# EAGLE board chart (EAGLE 7.6.0)
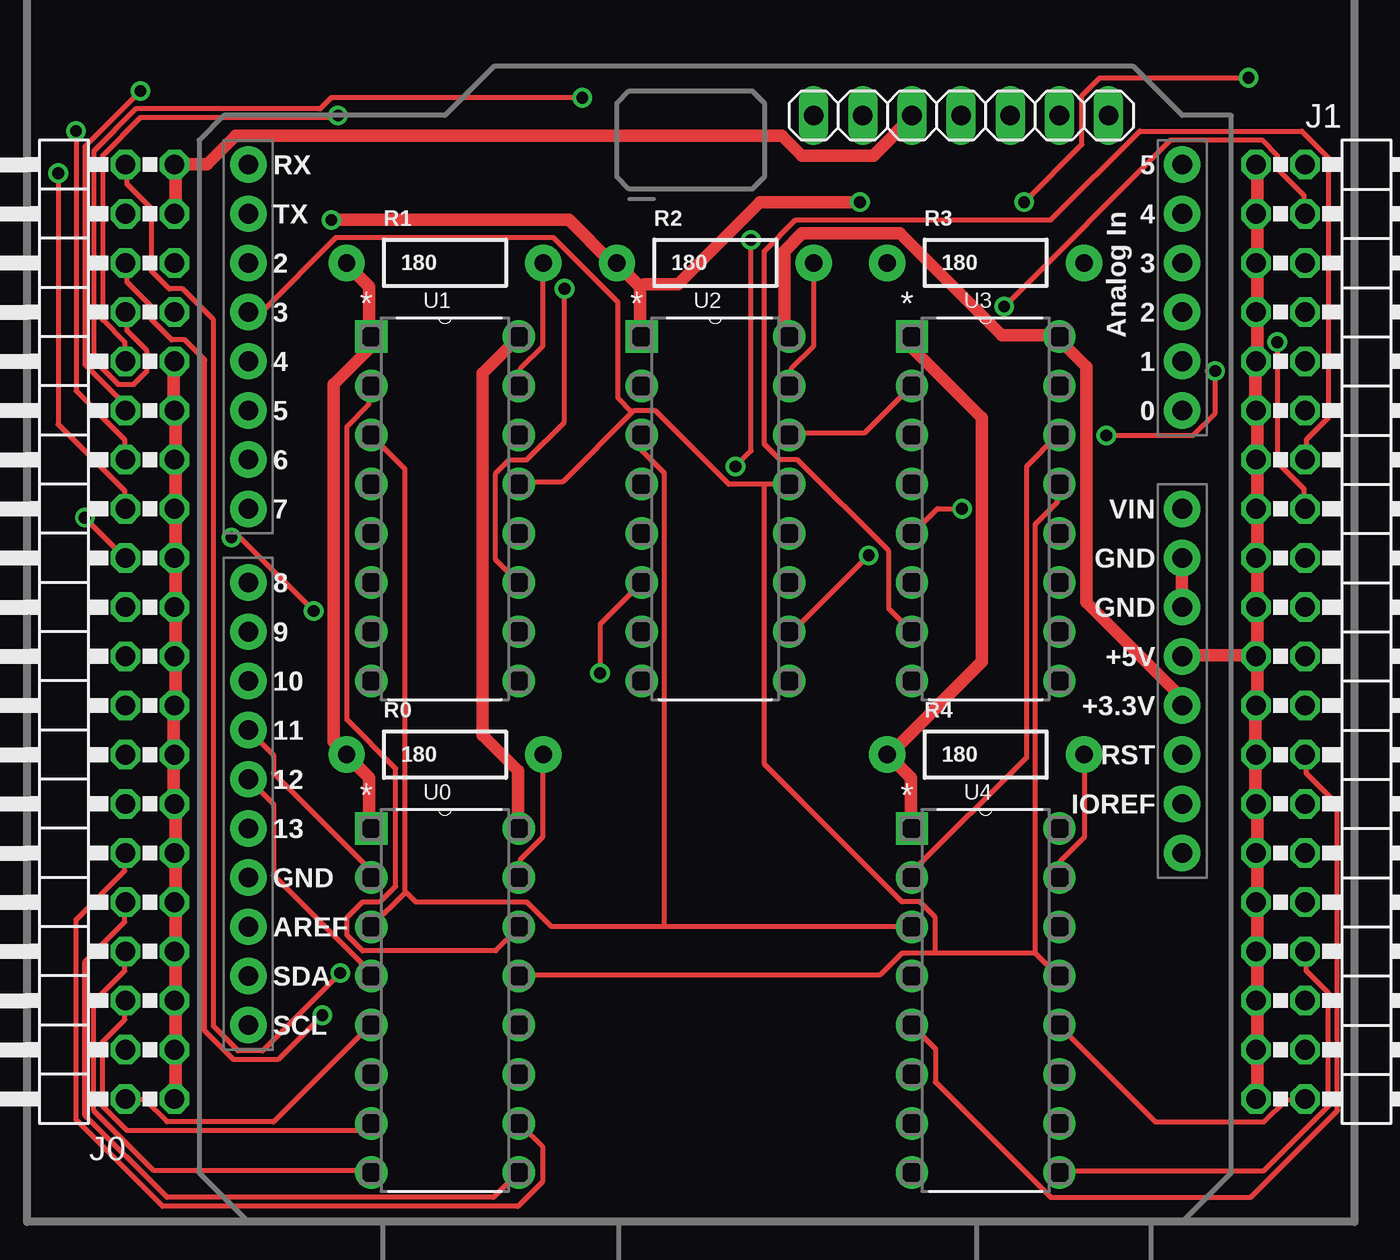
[diagram p0: board, top side]
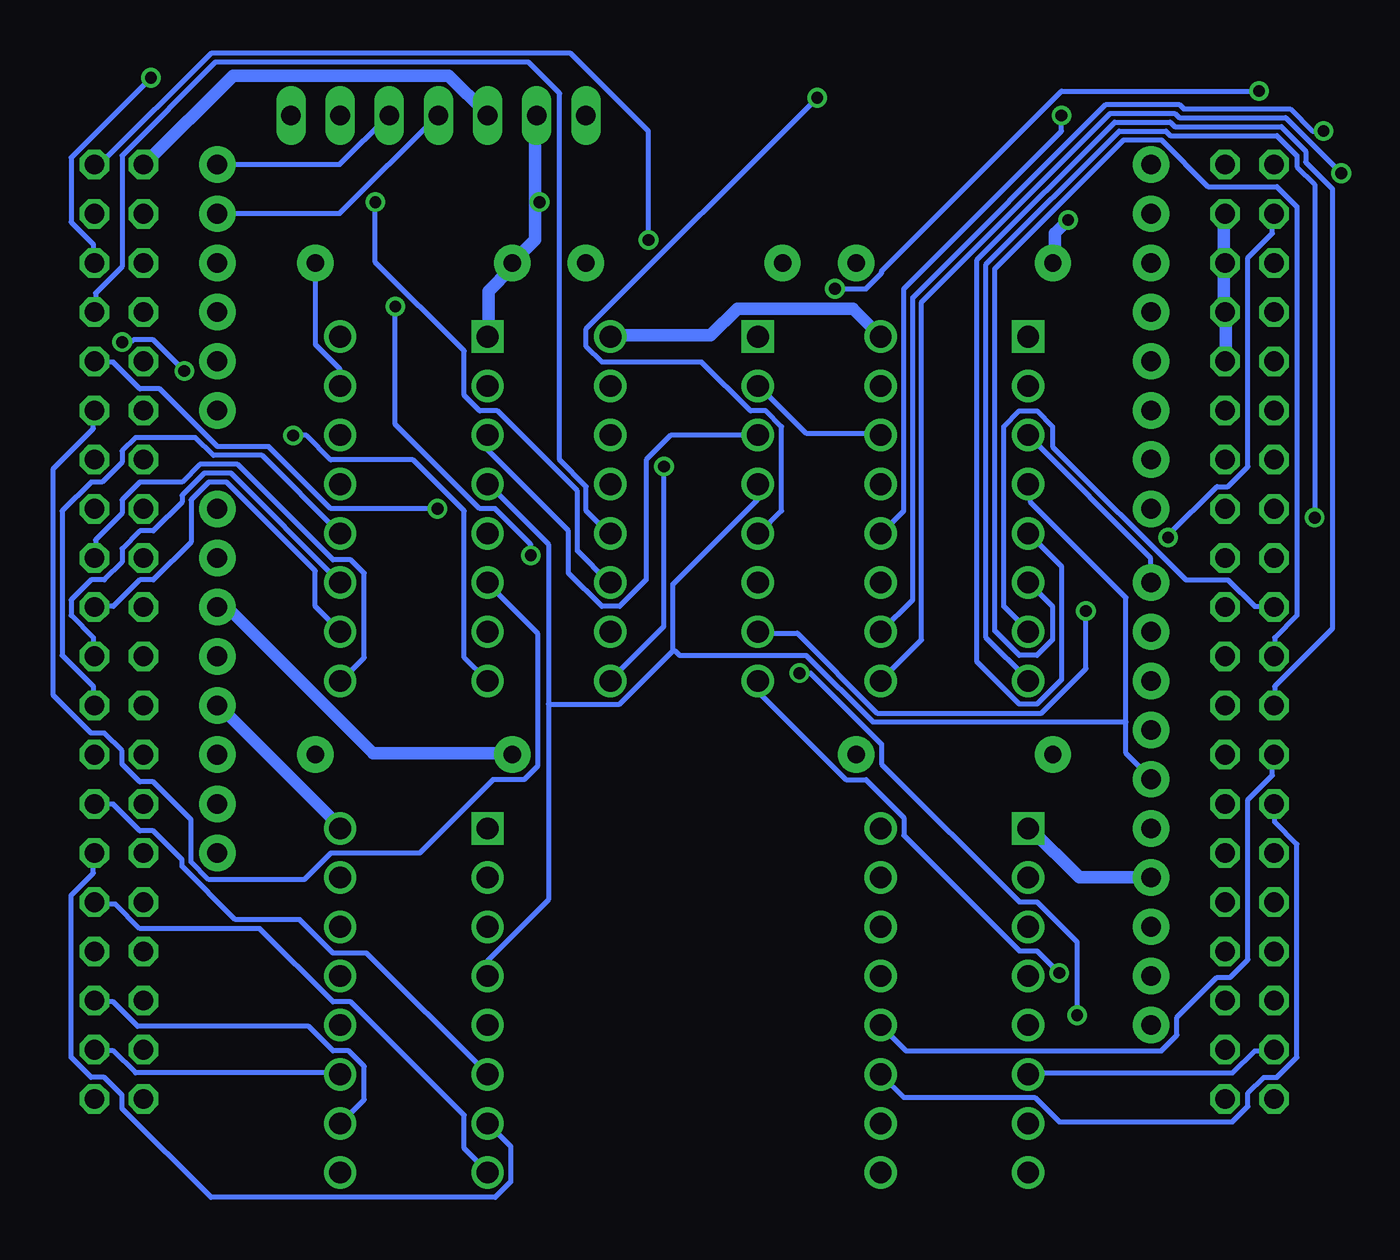
[diagram p1: board, bottom side, seen from below]

No outline drawn. Coordinates in mm, seen from the top.
Copper layers (1*16): Top 0.035mm / dielectric 1.5mm / Bottom 0.035mm
Design rules "chart": minimum track width 10mil, minimum drill 24mil, track to track 0.205mm, track to pad 0.205mm, pad to pad 0.205mm, via to via 0.205mm, smd to smd 8mil, copper to edge 40mil, drill to drill 8mil, minimum pad ring 10mil, minimum via ring 8mil, stop-mask expansion 4mil, vias tented up to drill 0mil, thermal gap 10mil
Net classes: 0 default: width 0.254 mm, clearance 0.205 mm; 1 ground: width 0.635 mm, clearance 0.205 mm to class 0, clearance 0.254 mm; 2 VCC: width 0.635 mm, clearance 0.205 mm to class 0, clearance 0.205 mm to class 1, clearance 0.254 mm

## Footprints (pad centres in the part's own frame; a part is rotated, then mirrored left to right if it is on the bottom)
UNO_R3_SHIELD = drill 1.016 pad 1.88: 3.3V 50.8,26.67; 5V 50.8,29.21; A0 50.8,41.91; A1 50.8,44.45; A2 50.8,46.99; A3 50.8,49.53; A4 50.8,52.07; A5 50.8,54.61; AREF 2.54,15.24; D2 2.54,49.53; D3 2.54,46.99; D4 2.54,44.45; D5 2.54,41.91; D6 2.54,39.37; D7 2.54,36.83; D8 2.54,33.02; D9 2.54,30.48; D10 2.54,27.94; D11 2.54,25.4; D12 2.54,22.86; D13 2.54,20.32; GND@0 50.8,31.75; GND@1 50.8,34.29; GND@2 2.54,17.78; IOREF 50.8,21.59; NC 50.8,19.05; RES 50.8,24.13; RX 2.54,54.61; SCL 2.54,10.16; SDA 2.54,12.7; TX 2.54,52.07; VIN 50.8,36.83
2X20/90 = drill 1.016 octagon: 1 -24.13,-6.35; 2 -24.13,-3.81; 3 -21.59,-6.35; 4 -21.59,-3.81; 5 -19.05,-6.35; 6 -19.05,-3.81; 7 -16.51,-6.35; 8 -16.51,-3.81; 9 -13.97,-6.35; 10 -13.97,-3.81; 11 -11.43,-6.35; 12 -11.43,-3.81; 13 -8.89,-6.35; 14 -8.89,-3.81; 15 -6.35,-6.35; 16 -6.35,-3.81; 17 -3.81,-6.35; 18 -3.81,-3.81; 19 -1.27,-6.35; 20 -1.27,-3.81; 21 1.27,-6.35; 22 1.27,-3.81; 23 3.81,-6.35; 24 3.81,-3.81; 25 6.35,-6.35; 26 6.35,-3.81; 27 8.89,-6.35; 28 8.89,-3.81; 29 11.43,-6.35; 30 11.43,-3.81; 31 13.97,-6.35; 32 13.97,-3.81; 33 16.51,-6.35; 34 16.51,-3.81; 35 19.05,-6.35; 36 19.05,-3.81; 37 21.59,-6.35; 38 21.59,-3.81; 39 24.13,-6.35; 40 24.13,-3.81
1X07 = drill 1.016 long: 1 -7.62,0; 2 -5.08,0; 3 -2.54,0; 4 0,0; 5 2.54,0; 6 5.08,0; 7 7.62,0
AXIAL-0.4 = drill 0.9 pad 1.88: P$1 -5.08,0; P$2 5.08,0
DIP254P762X508-16 = drill 1.118 square: 1 -7.62,17.78 | drill 1.118: 2 -7.62,15.24; 3 -7.62,12.7; 4 -7.62,10.16; 5 -7.62,7.62; 6 -7.62,5.08; 7 -7.62,2.54; 8 -7.62,0; 9 0,0; 10 0,2.54; 11 0,5.08; 12 0,7.62; 13 0,10.16; 14 0,12.7; 15 0,15.24; 16 0,17.78

## Placement (x,y rotation side)
B0  ARDUINO_R3_SHIELD  [UNO_R3_SHIELD]  8.89,0 0 top
J0  2x20  [2X20/90]  1.27,30.48 90 top
J1  2x20  [2X20/90]  69.85,30.48 270 top
JPRTC0  Tiny RTC  [1X07]  48.26,57.15 0 top
R0  180  [AXIAL-0.4]  21.59,24.13 0 top
R1  180  [AXIAL-0.4]  21.59,49.53 0 top
R2  180  [AXIAL-0.4]  35.56,49.53 0 top
R3  180  [AXIAL-0.4]  49.53,49.53 0 top
R4  180  [AXIAL-0.4]  49.53,24.13 0 top
U0  TLC5916IN  [DIP254P762X508-16]  25.4,2.54 0 top
U1  TLC5916IN  [DIP254P762X508-16]  25.4,27.94 0 top
U2  TLC5916IN  [DIP254P762X508-16]  39.37,27.94 0 top
U3  TLC5916IN  [DIP254P762X508-16]  53.34,27.94 0 top
U4  TLC5916IN  [DIP254P762X508-16]  53.34,2.54 0 top

## Library data of the parts
B0 = SparkFun-Boards
J0 J1 JPRTC0 = pinhead
R0 R1-R4 = SparkFun-Resistors
U0 U1-U4 = Texas Instruments_By_element14_Batch_1; MPN: TLC5916IN; OC_FARNELL: 1647814; OC_NEWARK: 60M1749; PACKAGE: PDIP-16; SUPPLIER: Texas Instruments

## Nets
BAT: JPRTC0.1
DATA0: B0.D11 U0.2
DATA1: U0.14 U1.2
DATA2: U1.14 U2.2
DATA3: U2.14 U3.2
DATA4: U3.14 U4.2
DATA5: U4.14
DS-NC: JPRTC0.6
GND [ground]: B0.GND@0 B0.GND@1 B0.GND@2 JPRTC0.2 R0.P$1 R1.P$1 R2.P$1 R3.P$1 R4.P$1 U0.1 U1.1 U2.1 U3.1 U4.1
L0-0: J0.2 U0.5
L0-1: J0.4 U0.6
L0-2: J0.6 U0.7
L0-3: J0.8 U0.8
L0-4: J0.10 U0.9
L0-5: J0.12 U0.10
L0-6: J0.14 U0.11
L0-7: J0.16 U0.12
L1-0: J0.18 U1.5
L1-1: J0.20 U1.6
L1-2: J0.22 U1.7
L1-3: J0.24 U1.8
L1-4: J0.26 U1.9
L1-5: J0.28 U1.10
L1-6: J0.30 U1.11
L1-7: J0.32 U1.12
L2-0: J0.34 U2.5
L2-1: J0.36 U2.6
L2-2: J0.38 U2.7
L2-3: J0.40 U2.8
L2-4: J1.2 U2.9
L2-5: J1.4 U2.10
L2-6: J1.6 U2.11
L2-7: J1.8 U2.12
L3-0: J1.10 U3.5
L3-1: J1.12 U3.6
L3-2: J1.14 U3.7
L3-3: J1.16 U3.8
L3-4: J1.18 U3.9
L3-5: J1.20 U3.10
L3-6: J1.22 U3.11
L3-7: J1.24 U3.12
L4-0: J1.26 U4.5
L4-1: J1.28 U4.6
L4-2: J1.30 U4.7
L4-3: J1.32 U4.8
L4-4: J1.34 U4.9
L4-5: J1.36 U4.10
L4-6: J1.38 U4.11
L4-7: J1.40 U4.12
LATCH: B0.D12 U0.4 U1.4 U2.4 U3.4 U4.4
N$1: R1.P$2 U1.15
N$2: R2.P$2 U2.15
N$3: R3.P$2 U3.15
N$4: R4.P$2 U4.15
N$6: R0.P$2 U0.15
PWM: B0.D3 U0.13 U1.13 U2.13 U3.13 U4.13
SCA: B0.A4 JPRTC0.4
SCK: B0.D8 U0.3 U1.3 U2.3 U3.3 U4.3
SCL: B0.A5 JPRTC0.5
SQ-NC: JPRTC0.7
VCC [VCC]: B0.5V J0.1 J0.3 J0.5 J0.7 J0.9 J0.11 J0.13 J0.15 J0.17 J0.19 J0.21 J0.23 J0.25 J0.27 J0.29 J0.31 J0.33 J0.35 J0.37 J0.39 J1.1 J1.3 J1.5 J1.7 J1.9 J1.11 J1.13 J1.15 J1.17 J1.19 J1.21 J1.23 J1.25 J1.27 J1.29 J1.31 J1.33 J1.35 J1.37 J1.39 JPRTC0.3
VDD [VCC]: B0.3.3V U0.16 U1.16 U2.16 U3.16 U4.16

## Tracks (layer width: path | path; a pad name or v marks a point on that pad's centre or on a via)
DATA0
  Top 0.254: U0.2 17.67,17.79 17.67,18.25 12.74,23.18 12.74,24.1 11.47,25.36 B0.D11
DATA1
  Top 0.254: U1.2 17.67,43.15 17.67,42.23 16.52,41.08 16.52,25.93 19.05,23.41 19.05,17.33 18.25,16.52 17.33,16.52 16.52,15.72 16.52,14.8 17.33,14 24.21,14 25.36,15.15 U0.14
DATA2
  Bottom 0.254: U1.14 25.47,40.74 29.26,40.74 31.67,43.15 U2.2
DATA3
  Top 0.254: U2.14 39.47,40.74 43.26,40.74 45.67,43.15 U3.2
DATA4
  Top 0.254: U4.2 45.78,17.79 45.78,18.13 51.64,23.98 51.64,39.02 53.24,40.62 U3.14
GND  (via drill 0.61)
  Top 0.635: R1.P$1 16.52,49.46 17.67,48.31 17.67,45.78 U1.1 17.67,45.44 17.67,45.1 15.84,43.26 15.84,24.79 16.29,24.33 R0.P$1 16.52,24.1 17.67,22.95 17.67,20.43 U0.1 | 31.67,48.31 31.67,45.78 U2.1 | 31.67,48.31 30.52,49.46 R2.P$1 30.18,49.57 28,51.75 v15.72,51.75 | v43.03,52.67 37.87,52.67 33.62,48.42 31.9,48.42 31.67,48.31 | B0.GND@0 59.67,31.79 59.67,34.2 B0.GND@1 | U4.1 45.67,20.43 45.67,22.95 44.52,24.1 R4.P$1 44.75,24.33 49.34,28.92 49.34,41.54 45.78,45.1 45.78,45.67 U3.1
  Bottom 0.635: B0.GND@2 11.47,17.79 15.15,17.79 17.67,20.31 U0.1 | 43.26,52.67 43.26,50.72 44.41,49.57 R3.P$1 44.52,49.23 45.67,48.08 45.67,45.78 U3.1 | 43.26,52.67 43.26,57.15 JPRTC0.2 | v43.03,52.67 43.26,52.67 | B0.GND@0 59.67,31.67 59.1,31.67 51.64,24.21 44.52,24.21 R4.P$1 | v15.72,51.75 16.41,51.06 16.41,49.57 R1.P$1
L0-0
  Top 0.254: J0.2 5.16,6.31 6.08,6.31 7.23,5.16 12.74,5.16 17.67,10.1 U0.5
L0-1
  Bottom 0.254: J0.4 5.16,8.84 6.08,8.84 7.23,7.69 17.67,7.69 U0.6
L0-2
  Top 0.254: J0.6 5.05,11.36 5.05,10.44 3.9,9.29 3.9,5.97 5.16,4.71 17.33,4.71 17.67,5.05 U0.7
L0-3
  Top 0.254: J0.8 5.05,13.88 5.05,12.97 3.44,11.36 3.44,5.74 6.54,2.64 17.67,2.64 U0.8
L0-4
  Top 0.254: J0.10 5.05,16.41 5.05,15.49 2.98,13.43 2.98,5.51 7.23,1.26 24.1,1.26 25.36,2.52 U0.9
L0-5
  Top 0.254: J0.12 5.05,19.05 5.05,18.13 2.52,15.61 2.52,5.28 7,0.8 25.36,0.8 26.62,2.07 26.62,3.9 25.47,5.05 U0.10
L0-6
  Bottom 0.254: J0.14 5.05,21.57 5.05,20.66 3.9,19.51 3.9,8.49 4.93,7.46 5.62,7.46 6.43,6.66 6.43,5.97 7.23,5.16 16.18,5.16 17.44,6.43 24.21,6.43 25.36,7.57 U0.11
L0-7
  Bottom 0.254: J0.16 5.16,24.1 5.16,23.07 6.43,21.8 6.43,13.54 7.34,12.62 8.03,12.62 10.1,10.56 10.1,9.64 10.9,8.84 24.1,8.84 25.36,10.1 U0.12
L1-0
  Bottom 0.254: J0.18 5.05,26.74 5.05,27.66 2.07,30.64 2.07,53.36 3.44,54.74 3.44,55.31 4.71,56.57 10.21,56.57 10.44,56.8 13.31,56.8 20.43,49.69 20.43,28.92 18.25,26.74 17.33,26.74 16.07,28 16.07,33.85 17.67,35.46 U1.5
L1-1
  Bottom 0.254: J0.20 5.05,29.26 5.05,30.18 3.9,31.33 3.9,52.44 4.93,53.47 8.49,53.47 10.9,55.88 12.85,55.88 19.51,49.23 19.51,30.52 18.25,29.26 17.33,29.26 16.52,30.06 16.52,31.79 17.67,32.93 U1.6
L1-2
  Bottom 0.254: J0.22 5.16,31.79 6.08,31.79 7.46,33.16 9.64,33.16 16.52,40.05 16.52,41.08 17.33,41.88 18.25,41.88 19.05,41.08 19.05,31.79 17.79,30.52 U1.7
L1-3  (via drill 0.61)
  Top 0.254: v2.98,36.38 5.05,34.31 J0.24
  Bottom 0.254: v2.98,36.38 2.98,53.59 3.9,54.51 3.9,55.08 4.93,56.11 10.44,56.11 10.67,56.34 13.08,56.34 19.97,49.46 19.97,30.18 17.79,28 U1.8
L1-4  (via drill 0.61)
  Top 0.254: v1.61,54.16 1.61,41.2 5.05,37.75 5.05,36.84 J0.26
  Bottom 0.254: v1.61,54.16 4.47,57.03 9.98,57.03 10.21,57.26 13.54,57.26 23.29,47.51 23.29,30.06 25.36,28 U1.9
L1-5  (via drill 0.61)
  Top 0.254: v2.52,56.34 2.52,42.92 5.05,40.39 5.05,39.47 J0.28
  Bottom 0.254: v2.52,56.34 3.1,56.34 4.25,57.49 9.75,57.49 9.98,57.72 13.77,57.72 23.75,47.74 23.75,32.13 25.36,30.52 U1.10
L1-6  (via drill 0.61)
  Top 0.254: v5.85,58.41 2.98,55.54 2.98,44.29 5.05,42.23 5.05,42 J0.30 | v27.77,48.2 27.77,41.31 25.82,39.36 24.9,39.36 24.21,38.67 24.21,34.2 25.36,33.05 U1.11
  Bottom 0.254: v5.85,58.41 16.07,58.41 25.36,49.11 25.36,49 26.16,48.2 v27.77,48.2
L1-7  (via drill 0.61)
  Top 0.254: v16.07,57.15 15.95,57.03 5.85,57.03 3.9,55.08 3.9,46.59 5.05,45.44 5.05,44.52 J0.32
  Bottom 0.254: v16.07,57.15 16.07,56.34 24.21,48.2 24.21,36.72 25.36,35.57 U1.12
L2-0  (via drill 0.61)
  Top 0.254: v28.69,58.06 15.72,58.06 15.15,57.49 5.62,57.49 3.44,55.31 3.44,44.52 4.71,43.26 5.51,43.26 6.2,43.95 6.2,44.98 5.16,46.02 5.16,46.93 J0.34
  Bottom 0.254: v28.69,58.06 40.62,46.13 40.62,45.21 39.82,44.41 34.65,44.41 32.13,41.88 31.33,41.88 30.52,41.08 30.52,36.72 31.67,35.57 U2.5
L2-1  (via drill 0.61)
  Top 0.254: v15.26,10.67 12.97,8.38 10.67,8.38 9.18,9.87 9.18,44.52 8.15,45.56 7.46,45.56 6.43,46.59 6.43,47.28 5.16,48.54 5.16,49.46 J0.36 | v29.61,28.34 29.61,30.87 31.67,32.93 U2.6
  Bottom 0.254: v15.26,10.67 15.26,14.46 17.33,16.52 18.25,16.52 25.36,23.64 25.36,24.67 29.03,28.34 v29.61,28.34
L2-2  (via drill 0.61)
  Top 0.254: v10.56,35.34 11.02,35.34 v14.8,31.56
  Bottom 0.254: v10.56,35.34 10.56,35.46 8.03,37.98 7.46,37.98 6.43,39.02 6.43,49.8 5.16,51.06 5.16,51.98 J0.38 | v14.8,31.56 14.8,28.57 17.1,26.28 25.59,26.28 29.72,30.41 31.67,30.41 U2.7
L2-3  (via drill 0.61)
  Top 0.254: v16.18,12.85 12.16,8.84 10.9,8.84 9.64,10.1 9.64,46.59 8.03,48.2 7.34,48.2 6.43,49.11 6.43,52.33 5.16,53.59 5.16,54.51 J0.40
  Bottom 0.254: v16.18,12.85 17.33,14 18.25,14 24.21,19.97 24.21,20.88 26.16,22.84 27.2,22.84 31.67,27.31 31.67,27.88 U2.8
L2-4  (via drill 0.61)
  Top 0.254: v37.41,50.72 37.41,39.82 v36.6,39.02
  Bottom 0.254: v37.41,50.72 37.41,56.34 41.42,60.36 60.01,60.36 65.75,54.62 65.98,54.62 J1.2 | v36.6,39.02 36.6,30.75 39.36,28 U2.9
L2-5  (via drill 0.61)
  Top 0.254: v50.49,47.28 59.1,55.88 63.8,55.88 64.6,55.08 64.6,54.39 65.98,53.01 65.98,52.1 J1.4 | v43.49,34.42 39.47,30.41 U2.10
  Bottom 0.254: v50.49,47.28 50.49,41.2 46.13,36.84 45.33,36.84 43.49,35 v43.49,34.42
L2-6  (via drill 0.61)
  Top 0.254: v63.11,59.1 55.42,59.1 54.51,58.18 54.51,55.65 v51.52,52.67
  Bottom 0.254: v63.11,59.1 67.24,54.97 67.24,51.64 66.1,50.49 66.1,49.57 J1.6 | v51.52,52.67 51.52,49.57 46.93,44.98 46.93,42.69 46.13,41.88 45.21,41.88 41.08,37.75 41.08,34.65 39.47,33.05 U2.11
L2-7
  Bottom 0.254: J1.8 65.98,47.05 65.98,47.97 64.6,49.34 64.6,55.08 59.78,59.9 43.6,59.9 42,58.29 42,39.36 40.62,37.98 40.62,36.72 39.47,35.57 U2.12
L3-0  (via drill 0.61)
  Top 0.254: v48.31,36.84 47.05,36.84 45.78,35.57 U3.5
  Bottom 0.254: v48.31,36.84 53.82,36.84 57.03,40.05 59.67,40.05 62.65,43.03 63.69,43.03 65.06,44.41 65.98,44.41 J1.10
L3-1
  Bottom 0.254: J1.12 66.1,41.88 66.1,40.97 68.16,38.9 68.16,27.2 66.21,25.25 65.52,25.25 64.6,24.33 64.6,23.64 63.69,22.72 63,22.72 61.05,20.77 61.05,18.59 60.13,17.67 55.2,17.67 53.82,19.05 49.23,19.05 45.44,22.84 43.83,22.84 43.15,23.52 43.15,30.41 45.67,32.93 U3.6
L3-2
  Top 0.254: J1.14 66.1,39.47 66.1,40.39 67.24,41.54 67.24,54.97 65.87,56.34 57.49,56.34 52.9,51.75 39.7,51.75 38.1,50.15 38.1,40.16 38.9,39.36 39.82,39.36 44.52,34.65 44.52,31.67 45.67,30.52 U3.7
L3-3  (via drill 0.61)
  Top 0.254: v64.6,45.44 64.6,39.24 65.98,37.87 65.98,36.84 J1.16 | v61.39,43.95 61.39,41.77 60.24,40.62 v55.77,40.62
  Bottom 0.254: v64.6,45.44 64.14,45.44 64.03,45.56 63,45.56 v61.39,43.95 | v55.77,40.62 55.08,40.62 53.82,39.36 49.57,39.36 46.93,36.72 46.93,29.15 45.78,28 U3.8
L3-4
  Bottom 0.254: J1.18 65.98,34.31 65.98,35.23 64.6,36.6 64.6,37.29 63.69,38.21 61.51,38.21 60.59,39.13 58.64,39.13 53.7,34.2 52.78,34.2 52.1,33.51 52.1,29.15 53.24,28 U3.9
L3-5
  Bottom 0.254: J1.20 65.98,31.79 65.06,31.79 63.69,33.16 63,33.16 61.05,35.11 61.05,37.29 60.13,38.21 59.21,38.21 54.62,33.62 54.62,31.79 53.36,30.52 U3.10
L3-6
  Bottom 0.254: J1.22 66.1,29.26 66.1,30.18 67.24,31.33 67.24,32.13 66.21,33.16 65.52,33.16 64.6,34.08 64.6,34.77 63.69,35.69 63,35.69 61.51,37.18 61.51,37.52 60.36,38.67 58.98,38.67 53.36,33.05 U3.11
L3-7
  Bottom 0.254: J1.24 66.1,26.74 66.1,27.66 67.7,29.26 67.7,36.72 66.21,38.21 65.64,38.21 64.6,39.24 64.6,39.82 63.92,40.51 60.82,40.51 59.9,39.59 57.38,39.59 53.36,35.57 U3.12
L4-0
  Top 0.254: J1.26 66.1,24.1 66.1,23.18 67.7,21.57 67.7,5.74 63.23,1.26 52.9,1.26 46.93,7.23 46.93,8.95 45.78,10.1 U4.5
L4-1
  Bottom 0.254: J1.28 65.98,21.57 65.06,21.57 63.69,20.2 63,20.2 61.51,18.7 61.51,18.36 58.75,15.61 55.42,15.61 53.7,13.88 51.98,13.88 45.78,7.69 U4.6
L4-2
  Bottom 0.254: J1.30 66.1,19.05 66.1,18.02 67.24,16.87 67.24,8.49 66.21,7.46 65.52,7.46 64.6,6.54 64.6,5.85 60.01,1.26 45.33,1.26 44.52,2.07 44.52,3.9 45.67,5.05 U4.7
L4-3
  Bottom 0.254: J1.32 65.98,16.41 64.95,16.41 63.69,15.15 57.49,15.15 53.7,11.36 52.78,11.36 46.93,5.51 46.93,3.79 45.78,2.64 U4.8
L4-4
  Top 0.254: J1.34 66.1,13.88 66.1,12.97 67.24,11.82 67.24,5.97 63.92,2.64 53.36,2.64 U4.9
L4-5
  Bottom 0.254: J1.36 65.98,11.36 65.06,11.36 63.8,10.1 54.97,10.1 53.7,8.84 52.9,8.84 52.1,8.03 52.1,6.31 53.24,5.16 U4.10
L4-6
  Bottom 0.254: J1.38 65.98,8.84 65.06,8.84 63.92,7.69 53.36,7.69 U4.11
L4-7
  Top 0.254: J1.40 65.98,6.31 65.06,6.31 63.92,5.16 58.29,5.16 53.36,10.1 U4.12
LATCH
  Top 0.254: U0.4 17.67,12.74 17.67,12.97 12.74,17.9 12.74,21.57 11.47,22.84 B0.D12
  Bottom 0.254: 12.74,25.82 12.74,24.21 11.47,22.95 B0.D12 | 12.74,25.82 12.74,32.24 17.67,37.18 17.67,38.1 U1.4 | 42.57,26.74 42.57,35 45.67,38.1 U3.4 | 42.57,26.74 42.57,16.64 45.67,13.54 45.67,12.74 U4.4 | 36.15,29.49 36.15,32.93 31.79,37.29 31.79,38.1 U2.4 | 36.15,29.49 38.9,26.74 42.57,26.74 | 12.74,25.82 25.82,25.82 29.26,29.26 35.8,29.26 36.03,29.49 36.15,29.49
N$1
  Top 0.254: U1.15 25.47,43.26 25.47,44.06 26.62,45.21 26.62,49.46 R1.P$2
N$2
  Top 0.254: U2.15 39.47,43.26 39.47,44.06 40.62,45.21 40.62,49.46 R2.P$2
N$3
  Bottom 0.254: U3.15 53.36,43.26 53.36,44.06 54.62,45.33 54.62,49.46 R3.P$2
N$4
  Top 0.254: U4.15 53.36,17.79 53.36,18.59 54.62,19.85 54.62,24.1 R4.P$2
N$6
  Top 0.254: U0.15 25.47,17.79 25.47,18.7 26.62,19.85 26.62,24.1 R0.P$2
PWM
  Top 0.254: 31.27,41.83 31.33,41.88 32.47,41.88 36.26,38.1 38.1,38.1 | 31.27,41.83 27.66,38.21 25.47,38.21 U1.13 | 38.1,38.1 U2.13 | 31.27,41.83 30.52,42.57 30.52,47.51 27.2,50.83 15.95,50.83 12.16,47.05 11.47,47.05 B0.D3 | 52.1,13.88 46.93,13.88 | 46.93,13.88 45.21,13.88 44.06,12.74 25.47,12.74 U0.13 | 52.1,13.88 53.24,12.74 U4.13 | 52.1,13.88 52.1,36.03 53.24,37.18 53.24,38.1 U3.13 | 38.1,38.1 38.1,23.64 45.21,16.52 46.13,16.52 46.93,15.72 46.93,13.88
SCA
  Bottom 0.254: JPRTC0.4 48.31,57.15 53.36,52.1 59.67,52.1 B0.A4
SCK
  Top 0.254: 19.51,16.98 17.79,15.26 U0.3 | 19.51,16.98 19.51,38.9 17.79,40.62 U1.3 | 32.93,15.26 27.08,15.26 25.82,16.52 20.08,16.52 19.62,16.98 19.51,16.98 | 32.93,15.26 45.67,15.26 U4.3 | 32.93,15.26 32.93,38.67 31.79,39.82 31.79,40.62 U2.3
  Bottom 0.254: U3.3 45.67,40.62 45.67,39.82 41.54,35.69 41.54,33.51 39.82,31.79 38.9,31.79 37.52,33.16 37.52,39.36 36.26,40.62 31.79,40.62 U2.3 | B0.D8 11.47,33.05 11.47,34.31 17.79,40.62 U1.3
SCL
  Bottom 0.254: JPRTC0.5 50.83,57.15 53.36,54.62 59.67,54.62 B0.A5
VCC
  Top 0.635: J0.37 7.69,52.1 7.69,54.51 J0.39 7.92,54.62 9.29,54.62 10.79,56.11 39.02,56.11 40.05,55.08 43.72,55.08 45.78,57.15 JPRTC0.3 | J0.1 7.69,6.43 7.69,8.84 J0.3 7.69,9.18 7.69,11.36 J0.5 7.69,11.7 7.69,13.88 J0.7 7.69,14.23 7.69,16.41 J0.9 7.69,16.75 7.69,19.05 J0.11 7.69,19.28 7.69,21.57 J0.13 7.57,21.92 7.57,24.1 J0.15 7.57,24.44 7.57,26.62 J0.17 7.69,26.97 7.69,29.15 J0.19 7.69,29.49 7.69,31.67 J0.21 7.69,32.02 7.69,34.2 J0.23 7.69,34.54 7.69,36.72 J0.25 7.69,37.06 7.69,39.36 J0.27 7.69,39.59 7.69,41.88 J0.29 7.57,42.23 7.57,44.41 J0.31 | J1.39 63.57,6.43 63.57,8.84 J1.37 63.57,9.18 63.57,11.36 J1.35 63.57,11.7 63.57,13.88 J1.33 63.57,14.23 63.57,16.41 J1.31 63.57,16.75 63.57,19.05 J1.29 63.57,19.28 63.57,21.57 J1.27 63.46,21.92 63.46,24.1 J1.25 63.46,24.44 63.46,26.62 J1.23 63.57,26.97 63.57,29.15 J1.21 | J1.21 63.57,29.49 63.57,31.67 J1.19 63.57,32.02 63.57,34.2 J1.17 63.57,34.54 63.57,36.72 J1.15 63.57,37.06 63.57,39.36 J1.13 63.57,39.59 63.57,41.88 J1.11 63.46,42.23 63.46,44.41 J1.9 63.57,44.75 63.57,46.93 J1.7 63.57,47.28 63.57,49.46 J1.5 63.57,49.8 63.57,51.98 J1.3 63.57,52.33 63.57,54.51 J1.1 | B0.5V 59.78,29.26 63.23,29.26 J1.21
  Bottom 0.635: J0.37 7.69,51.98 7.69,49.8 J0.35 7.69,49.46 7.69,47.05 J0.33 7.57,46.7 7.57,44.52 J0.31 | JPRTC0.3 45.78,57.26 47.74,59.21 58.87,59.21 63.46,54.62 J1.1
VDD
  Top 0.635: U0.16 25.36,20.43 25.36,23.29 23.52,25.13 23.52,43.83 25.36,45.67 U1.16 | U2.16 39.36,45.78 39.13,46.02 39.13,50.15 40.05,51.06 45.1,51.06 50.38,45.78 53.24,45.78 U3.16 53.47,45.44 54.74,44.18 54.74,32.02 59.67,27.08 59.67,26.74 B0.3.3V
  Bottom 0.635: U4.16 53.36,20.43 59.67,26.74 B0.3.3V | U2.16 39.36,45.78 34.2,45.78 32.82,47.16 26.85,47.16 25.47,45.78 U1.16

## Text on the board
_tNames: JPRTC0 | J1 | R1 | R2 | R3 | U1 | U2 | U3 | R0 | R4 | U0 | U4 | J0
200bmp: C:/Users/jonross/Documents/Arduino/ChartLights/Eagle/Silkscreen/silk.bmp